# Altium PCB Sensor_module_envBoard.PcbDoc
Units mm, origin at the board's own origin, x right, y up, seen from the top; angles counter-clockwise.
Board outline 15.25 x 12.5 mm, 2 copper layers (Top Layer, Bottom Layer); 23 components, 11 nets, 79 pads, 17 vias.
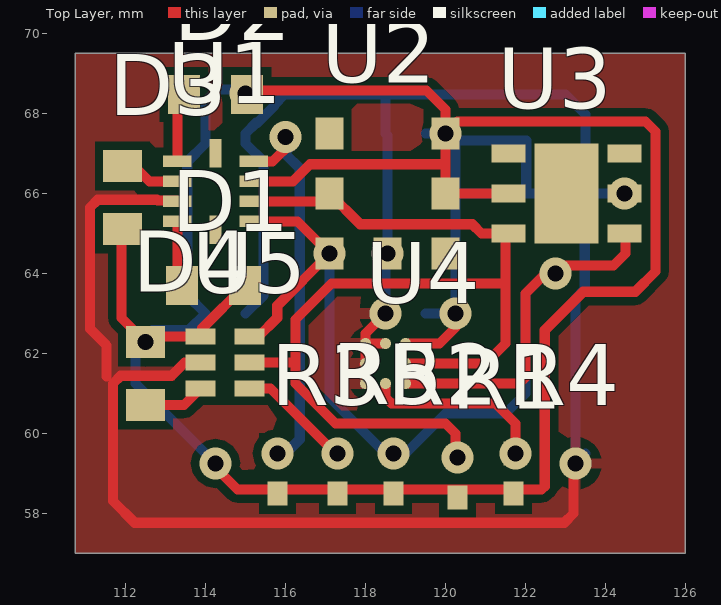
[diagram p0: Top Layer view]
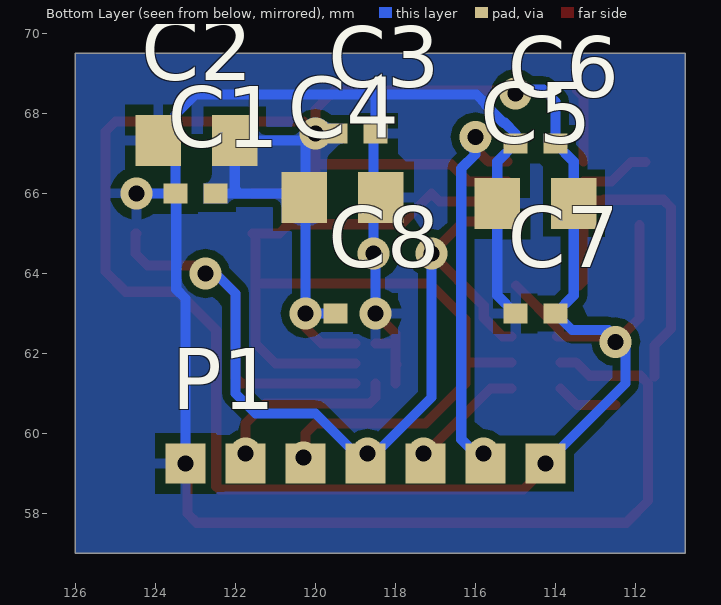
[diagram p1: Bottom Layer view, seen from below]

## Layer stack, top to bottom
Top Layer: signal copper 0.0356
Dielectric: dielectric 0.32, FR-4, Dk 4.8
Bottom Layer: signal copper 0.0356

## Board outline
110.75,69.5 126,69.5 126,57 110.75,57

## Design rules (kind name [scope] priority, off if disabled: settings)
Clearance [All] p1: gap=0.203
HoleSize [All] p1: absolutevalues=TRUE maxlimit=5 minlimit=0.3 maxpercent=80.000 minpercent=20.000
MinimumSolderMaskSliver [All] p1: minsoldermaskwidth=0
PlaneConnect [All] p1: planeconnectstyle=Direct reliefexpansion=0.508 reliefentries=4 reliefconductorwidth=0.254 reliefairgap=0.254
PolygonConnect [All] p1: connectstyle=Relief reliefconductorwidth=0.254 reliefentries=4 polygonreliefangle="90 Angle" airgapwidth=0.254
RoutingVias [All] p1: holewidth=0.4 width=0.8 viastyle="Through Hole" minholewidth=0.3 minwidth=0.6 maxholewidth=1 maxwidth=2
SilkToSilkClearance [All] p1: silktosilkclearance=0
SilkToSolderMaskClearance [IsPad] p1: minsilkscreentomaskgap=0 clearancetoexposedcopper=TRUE
SolderMaskExpansion [All] p1: expansion=0.051
Width [All] p1: maxlimit=2 minlimit=0.254 preferedwidth=0.3
23 further rules are at their usual default settings.

## Components (designator, comment, footprint, x,y, rotation, side; value= is the part's Value field where it differs from the comment)
C1 "Cap Semi" 0402 123,66 r180 bottom
C2 "10u" 0805 122.975,67.325 r180 bottom
C3 "Cap Semi" 0402 119,67.5 r0 bottom
C4 "10u" 0805 119.325,65.9 r0 bottom
C5 "10u" 0805 114.5,65.75 r180 bottom
C6 "Cap Semi" 0402 114.5,67.25 r180 bottom
C7 "Cap Semi" 0402 114.5,63 r180 bottom
C8 "Cap Semi" 0402 119,63 r0 bottom
D1 "IR" 0603 114.2,63.7 r180 top
D2 "IR" 0603 114.25,68.475 r180 top
D3 "IR" 0603 111.925,65.9 r90 top
D4 "White" 0603 112.5,61.5 r270 top
P1 "Header 7" 7pin_sensorBoard_connector_ 114.25,59.25 r0 bottom
R1 "Res2" 0402 120.3,58.9 r270 top
R2 "Res2" 0402 118.7,59 r270 top
R3 "Res2" 0402 115.8,59 r270 top
R4 "Res2" 0402 121.7,59 r270 top
R5 "Res2" 0402 117.3,59 r270 top
U1 "Si1147" Si1143 114.25,66 r180 top
U2 "BMP180" BMP180 120,64.5 r90 top
U3 "Si7021" Si7021 123,66 r90 top
U4 "TMP006" BGA8x3_ 118,62.25 r0 top
U5 "MAX44005" OTDFN6 114.5,61.75 r270 top

## Footprints (in the part's own frame and the unit in brackets; to place one, negate y for a bottom-side part, rotate by r counter-clockwise, add the part's x,y. Pads: shape width x height; smd on the part's side, far side on the other; paste and mask are expansions set on the pad)
7pin_sensorBoard_connector_ [mm]
  rect 1x1 smd: 1(0,0) 2(1.5,0) 3(3,0) 4(4.5,0) 5(6,0) 6(7.5,0) 7(9,0)
0402 [mm] "Chip Capacitor, Body 1.0x0.5mm, IPC High Density"
  rect 0.6x0.5 smd: 1(-0.5,0) 2(0.5,0)
  body extent -0.55,-0.3 0.55,0.3, height 1.3
0603 [mm]
  rect 0.8x0.965 smd: 1(-0.787,0) 2(0.788,0)
0805 [mm]
  rect 1.14x1.27 smd: 1(-0.955,0) 2(0.955,0)
BGA8x3_ [mm]
  round 0.28 smd: A1(0,0) A2(0.5,0) A3(1,0) B1(0,-0.5) B3(1,-0.5) C1(0,-1) C2(0.5,-1) C3(1,-1)
BMP180 [mm]
  rect 0.8x0.7 smd: 1(0,0) 2(1.5,0) 3(3,0) 4(3,2.9) 5(1.5,2.9) 6(0,2.9) 7(0,1.45)
OTDFN6 [mm]
  rect 0.4x0.75 smd: 1(-0.675,-0.625) 2(-0.025,-0.625) 3(0.625,-0.625) 4(0.625,0.6) 5(-0.025,0.6) 6(-0.675,0.6)
Si1143 [mil]
  rect 28x11.42 smd: 1(-37.5,27.53) 2(-37.5,7.84) 3(-37.5,-11.84) 4(-37.5,-31.53) 6(37.5,-31.53) 7(37.5,-11.84) 8(37.5,7.84) 9(37.5,27.53)
  rect 11.42x28 smd: 5(0,-39.5) 10(0,35.5)
Si7021 [mm]
  rect 0.45x0.85 smd: 1(-1,-1.475) 2(0,-1.475) 3(1,-1.475) 4(1,1.425) 5(0,1.425) 6(-1,1.425)
  rect 2.5x1.6 smd: 7(0,-0.025)

## Part data
C1 C3 C6 C7 C8: "Capacitor (Semiconductor SIM Model)"
C2 C4 C5: library part "Cap Semi", "Capacitor (Semiconductor SIM Model)"
D1 D2 D3 D4: library part LED0, "Typical INFRARED GaAs LED"
P1: "Header, 7-Pin"
R1 R2 R3 R4 R5: "Resistor"
U1: library part Si1143

## Via types
v1: diameter 0.8, hole 0.4, Top Layer to Bottom Layer, 17 vias

## Nets (pads, with @x,y where several pads share a name; then routed paths per layer and width w, separated by ;. In a path a pad name is that pad's centre, name@x,y a point inside that pad or via, vN(x,y) a via of type N, cw(c..) or ccw(c..) an arc to the next point about the centre after c; other vN are vias at no path point)
GND: C1.1 C2.1 C3.1 C4.1 C5.1 C6.1 C7.1 C8.1 P1.7 U1.8 U2.7 U3.2 U4.A1 U4.A2 U4.B1 U4.C1 U5.2 | length 57.6
  Top Layer w0.254: 111.525,61.425 111.525,62.203 111.112,62.616 111.112,65.649 111.306,65.843 112.788,65.843 112.805,65.826 113.273,65.826 U1.8 ; U5.2 113.483,61.775 113.151,61.443 111.881,61.443 111.687,61.249 111.687,58.313 112.23,57.77 122.97,57.77 123.2,58 123.2,59.2 v1(123.25,59.25) ; U4.B1@117.975,61.725 U4.B1 ; U4.C1 U4.B1 ; U4.A2 U4.A1 ; v1(118.5,63) 118,62.5 U4.A1 ; U2.7@118.5,64.45 v1(118.55,64.5) ; v1(118.55,64.5) U2.7@118.75,64.5 ; U3.2 v1(124.475,66.003) ; U4.B1 U4.A1
  Bottom Layer w0.254: C7.1 115.455,63.455 C5.1 115.455,66.795 C6.1 115,67.5 115.27,67.77 115.302,67.77 115.73,68.197 115.73,68.23 115.975,68.475 118.5,68.475 ; v1(118.5,63) 118.5,64.45 v1(118.55,64.5) 118.55,67.45 C3.1 118.5,68.475 ; P1.7@123.5,59.5 v1(123.25,59.25) 123.25,63.375 123.48,63.605 123.48,65.98 C1.1 ; v1(124.475,66.003) v1@124.478,66 ; 118.5,68.475 123,68.475 123.5,67.975 C1.1 ; C1.1 v1@124.478,66 ; v1@124.478,66 124.5,66 v1@124.478,66
INT_MAX44005: P1.3 R5.1 U5.4 | length 3.3
  Top Layer w0.254: U5.4 115.625,61.125 117.25,59.5 117.25,59.25 117.3,59.3 v1(117.3,59.5)
INT_SI1147: P1.2 R3.1 U1.4 | length 10.3
  Top Layer w0.254: U1.4 115.678,66.801 116.147,67.27 v1(116,67.417)
  Bottom Layer w0.254: v1(115.8,59.5) 115.8,59.3 116.355,59.855 116.355,66.627 116,66.982 116,67.04 116.23,67.27 116.147,67.27 v1(116,67.417)
INT_TMP006: P1.6 R4.1 U4.C2 | length 4.6
  Top Layer w0.254: U4.C2 118.5,60.9 118.65,60.75 121.25,60.75 121.75,60.25 v1(121.75,59.5)
NetD1_2: D1.2 U1.9 | length 1.6
  Top Layer w0.254: U1.9 113.298,63.815 D1.2
NetD2_2: D2.2 U1.6 | length 1.8
  Top Layer w0.254: U1.6 113.298,68.41 D2.2@113.462,68.575
NetD3_2: D3.2 U1.7 | length 1.7
  Top Layer w0.254: D3.2@111.75,66.788 112.112,66.788 112.599,66.301 U1.7
NetD4_2: D4.2 U5.3 | length 1.5
  Top Layer w0.254: D4.2 113.462,60.712 U5.3
SCL: P1.5 R1.1 U1.2 U2.5 U3.6 U4.B3 U5.5 | length 26.1
  Top Layer w0.254: U5.5 116.225,61.775 ; U1.2 116.901,65.801 U2.5 117.87,65.23 120.67,65.23 120.9,65 U3.6 121.5,64.925 121.5,63.75 ; U4.B3 121,61.75 121.5,62.25 121.5,63.75 ; v1(120.3,59.4) 120.3,59.3 120.25,59.25 120.25,60 120,60.25 117.25,60.25 116.25,61.25 116.25,62.85 117.15,63.75 121.5,63.75
SDA: P1.4 R2.1 U1.1 U2.6 U3.1 U4.C3 U5.6 | length 27.4
  Top Layer w0.254: U5.6 115.325,62.425 115.793,62.893 115.793,63.193 v1(117.1,64.5) 116.299,65.301 U1.1 ; U4.C3 121.85,61.25 122,61.4 122,63.5 122.5,64 v1(122.75,64) 122.95,64.2 124.2,64.2 124.5,64.5 124.5,65 U3.1
  Bottom Layer w0.254: v1(117.1,64.5) 117.1,60.9 P1.4 120,60.5 121.5,60.5 122,61 122,63.5 122.5,64 v1(122.75,64) ; P1.4@118.7,59.3 v1(118.7,59.5)
VCC: C1.2 C2.2 C3.2 C4.2 C5.2 C6.2 C7.2 C8.2 D1.1 D2.1 D3.1 D4.1 P1.1 R1.2 R2.2 R3.2 R4.2 R5.2 U1.3 U2.2 U2.3 U3.5 U4.A3 U5.1 | length 70.9
  Top Layer w0.254: D3.1@111.9,65.213 111.9,62.887 v1(112.5,62.287) ; D4.1@112.762,62.425 U5.1 ; U5.1@113.963,62.425 U5.1 ; v1(114.25,59.25) 114.2,59.2 114.8,58.6 122.4,58.6 122.48,58.68 122.48,62.58 123.443,63.543 124.743,63.543 125.25,64.05 125.25,67.55 125,67.8 120.3,67.8 v1(120,67.5) ; D1.1 113.919,62.631 113.919,62.469 U5.1 ; D2.1@115.037,68.575 119.525,68.575 120,68.1 v1(120,67.5) ; U1.3 116.184,66.301 116.613,66.73 119.98,66.73 120,66.75 ; U4.A3 119.85,62.25 120.25,62.65 v1(120.25,63) ; U3.5 U2.2 120,66.75 ; 120,66.75 v1(120,67.5)
  Bottom Layer w0.254: v1(112.5,62.287) v1@112.678,62.465 ; v1(114.25,59.25) 112.25,61.25 112.25,62.158 112.678,62.585 113.585,62.585 C7.2 113.545,63.455 C5.2 113.545,66.795 C6.2 114,68.3 114.3,68.6 115,68.6 v1(115,68.5) ; C8.2 v1(120.25,63) C4.2@120.25,66 ; C3.2 v1(120,67.5) v1@120.175,67.325 ; C1.2 121.9,66 ; v1@120.175,67.325 120.25,67.25 C4.2@120.25,66 ; v1@120.175,67.325 C2.2 122.02,66.12 121.9,66 ; C4.2@120.25,66 121.9,66
pads on no net: U1.5 U1.10 U2.1 U2.4 U3.3 U3.4 U3.7

## Polygon pours and split planes (outlines as drawn)
GND on Top Layer "Top Layer-No Net" (solid, pour order 4): 110.75,69.5 126,69.5 126,57 110.75,57
VCC on Bottom Layer "Top Layer-No Net" (solid, pour order 11): 119.3,68.2 123,68.2 123,65.2 119.3,65.2
GND on Bottom Layer "Top Layer-No Net" (solid, pour order 6): 110.75,69.5 126,69.5 126,57 110.75,57

## Dimensions
126,69.5 to 126,57 on Mechanical 1
110.75,69.5 to 126,69.5 on Mechanical 1